# EAGLE board audio_jack_breakout_TH (EAGLE 6.4)
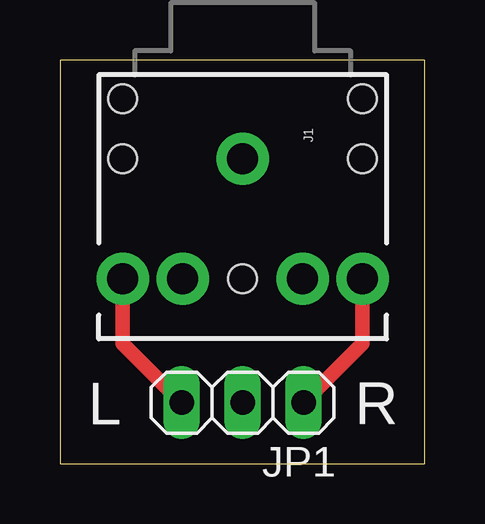
[diagram p0: board, top side]
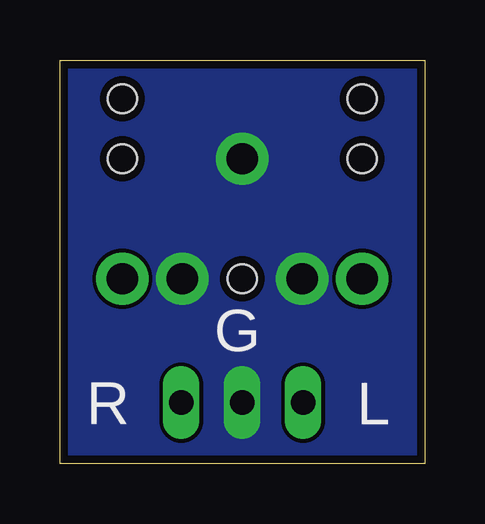
[diagram p1: board, bottom side, seen from below]

Size 15.22 x 16.81 mm. Coordinates in mm from the lower left corner, seen from the top.
Outline: 0,0 15.22,0 15.22,16.81 0,16.81 0,0
Copper layers (1*16): Top 0.035mm / dielectric 1.5mm / Bottom 0.035mm
Design rules "default *": minimum track width 6mil, minimum drill 13mil, track to track 6mil, track to pad 6mil, pad to pad 6mil, via to via 6mil, smd to smd 6mil, copper to edge 13mil, drill to drill 6mil, minimum pad ring 7mil, minimum via ring 7mil, stop-mask expansion 4mil, vias tented up to drill 0mil, thermal gap 10mil

## Footprints (pad centres in the part's own frame; a part is rotated, then mirrored left to right if it is on the bottom)
AUDIO-JACK = drill 1.3 pad 2.184: RING 5,5; RSH 5,2.5; SLEEVE 0,0; TIP 5,-5; TSH 5,-2.5 | hole 1.2: 0,5; -2.5,5; -2.5,-5; 0,-5; 5,0
1X03 = drill 1.016 long: 1 -2.54,0; 2 0,0; 3 2.54,0

## Placement (x,y rotation side)
J1  AUDIO-JACK2PTH  [AUDIO-JACK]  7.62,12.7 270 top
JP1  [1X03]  7.62,2.54 180 top

## Library data of the parts
J1 = SparkFun-Connectors
JP1 = pinhead

## Nets
GND: J1.RSH J1.SLEEVE J1.TSH JP1.2
N$1: J1.RING JP1.1
N$2: J1.TIP JP1.3

## Tracks (layer width: path | path; a pad name or v marks a point on that pad's centre or on a via)
GND
  pour Bottom (no thermals): 0.25,16.56 14.88,16.56 14.88,0.25 0.25,0.25
N$1
  Top 0.61: J1.RING 12.62,5 JP1.1
N$2
  Top 0.61: J1.TIP 2.62,5 JP1.3

## Text on the board
tPlace: L | R
bPlace: G | L | R